# Altium PCB 4P_JST-PH-3_EXT.PcbDoc
Units mm, origin at the board's own origin, x right, y up, seen from the top; angles counter-clockwise.
Board outline 15 x 46.5 mm, 2 copper layers (Top Layer, Bottom Layer), stack 1.569 mm thick; 6 components, 0 nets, 26 pads, 0 vias.
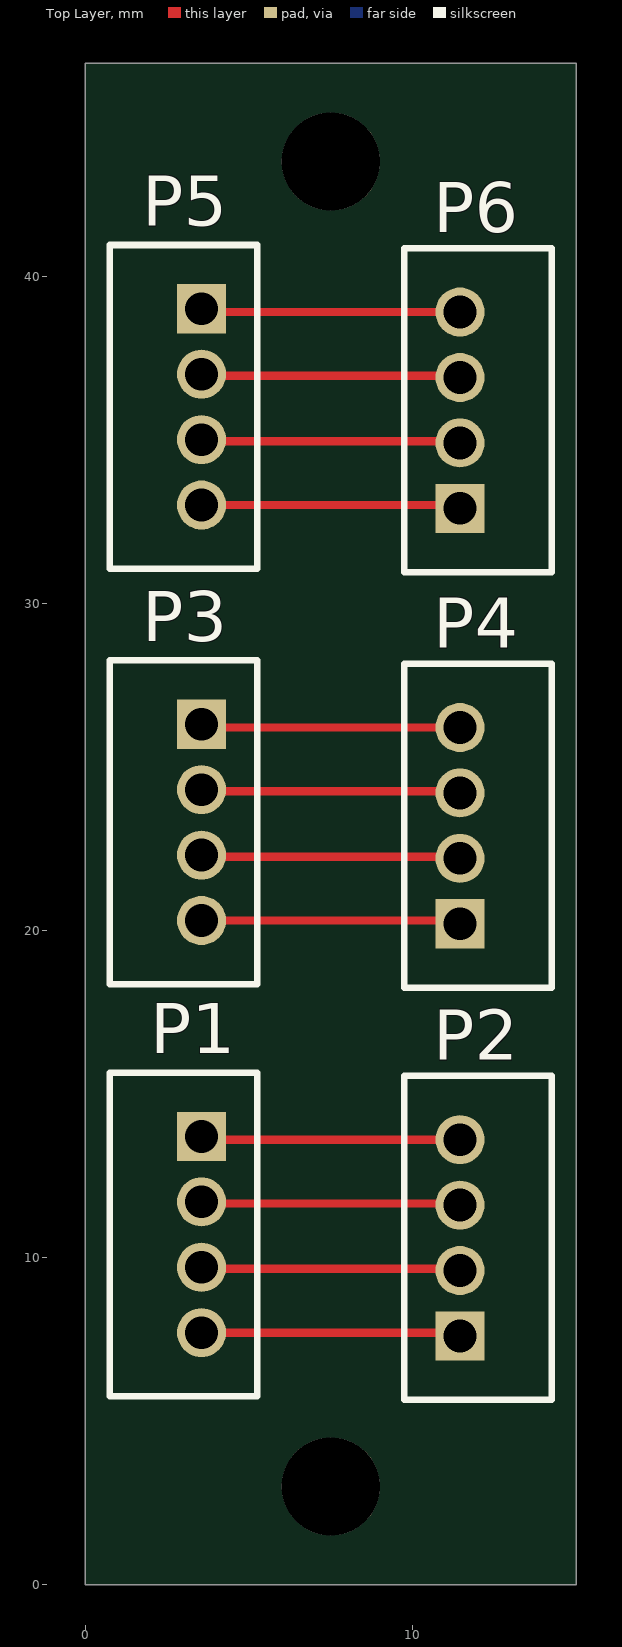
[diagram p0: Top Layer view]
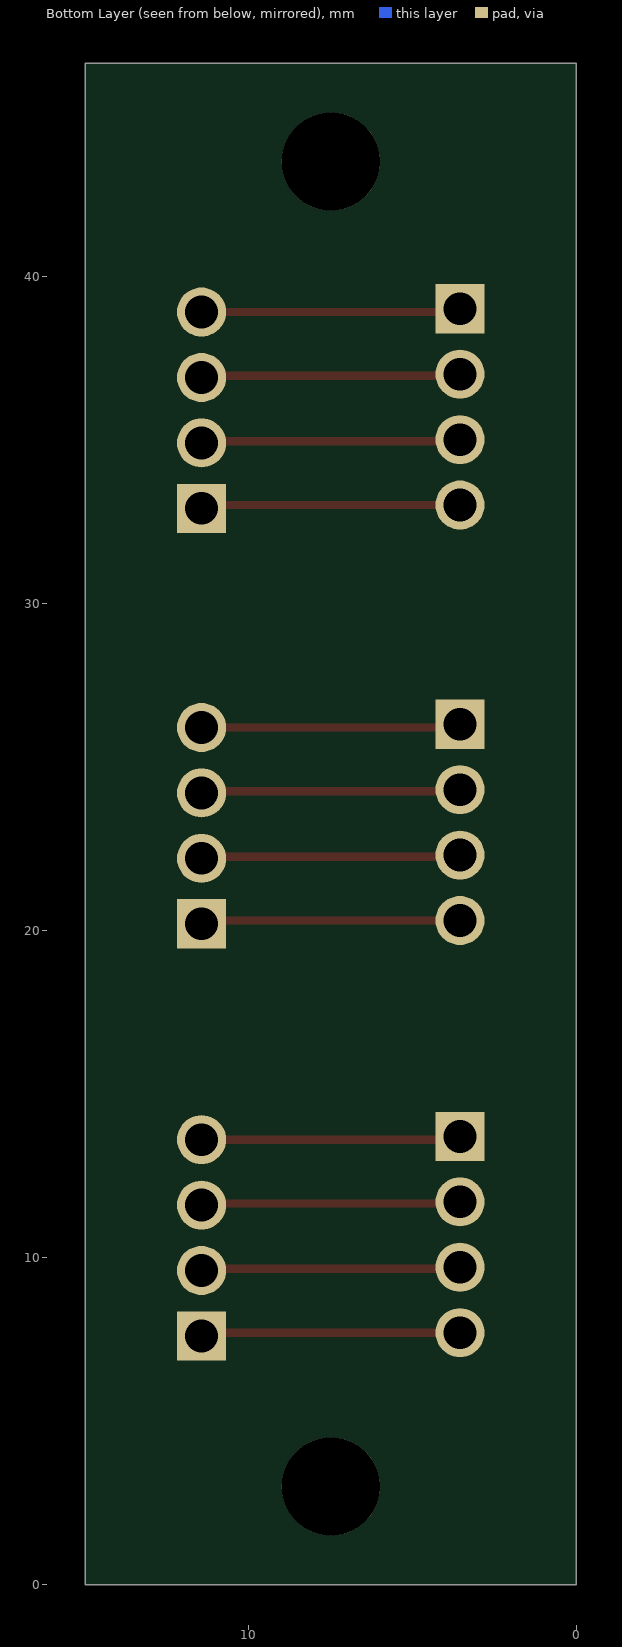
[diagram p1: Bottom Layer view, seen from below]

## Layer stack, top to bottom
Top Solder: solder mask 0.0254, SM-001, Dk 4
Top Layer: signal copper 0.035
Dielectric 1: core 1.4986, Core-043, Dk 4.3
Bottom Layer: signal copper 0.035
Bottom Solder: solder mask 0.0254, SM-001, Dk 4

## Board outline
0,0 15,0 15,46.5 0,46.5

## Design rules (kind name [scope] priority, off if disabled: settings)
Clearance [All] p1: gap=0.254 ignorepadtopadclearanceinfootprint=FALSE except(0: Arc-Hole Track-Hole SMDPad-Hole THPad-Hole Via-Hole Fill-Hole Poly-Hole Region-Hole Text-Hole)
PolygonConnect [All] p1: connectstyle=Relief reliefconductorwidth=0.254 reliefentries=4 polygonreliefangle="90 Angle" airgapwidth=0.254
RoutingVias [All] p1: holewidth=0.711 width=1.27 viastyle="Through Hole" minholewidth=0.711 minwidth=1.27 maxholewidth=0.711 maxwidth=1.27
SolderMaskExpansion [All] p1: expansion=0.102 istentingtop=FALSE
Width [All] p1: maxlimit=0.254 minlimit=0.254 preferedwidth=0.254
30 further rules are at their usual default settings.

## Components (designator, comment, footprint, x,y, rotation, side; value= is the part's Value field where it differs from the comment)
P1 "B4B-PH-K-S(LF)(SN)" JST-B4B-PH-K-S_V 3,10.7 r270 top
P2 "B4B-PH-K-S(LF)(SN)" JST-B4B-PH-K-S_V 12,10.6 r90 top
P3 "B4B-PH-K-S(LF)(SN)" JST-B4B-PH-K-S_V 3,23.3 r270 top (schematic designator P1)
P4 "B4B-PH-K-S(LF)(SN)" JST-B4B-PH-K-S_V 12,23.2 r90 top (schematic designator P2)
P5 "B4B-PH-K-S(LF)(SN)" JST-B4B-PH-K-S_V 3,36 r270 top (schematic designator P1)
P6 "B4B-PH-K-S(LF)(SN)" JST-B4B-PH-K-S_V 12,35.9 r90 top (schematic designator P2)

## Footprints (in the part's own frame and the unit in brackets; to place one, negate y for a bottom-side part, rotate by r counter-clockwise, add the part's x,y. Pads: shape width x height; smd on the part's side, far side on the other; paste and mask are expansions set on the pad)
JST-B4B-PH-K-S_V [mm] "Connector, 4-Leads, Body 9.9x4.5mm, Pitch 2mm"
  rect 1.5x1.5 hole 1: 1(-3,0.55)
  round 1.5 hole 1: 2(-1,0.55) 3(1,0.55) 4(3,0.55)
  silkscreen extent -4.95,-2.25 4.95,2.25, body extent -4.95,-2.25 4.95,2.25, height 6

## Part data
P1 P2 P3 P4 P5 P6: library part CMP-2000-05165-1, "Male Header, Pitch 2 mm, 1 x 4 Position, Height 6 mm, Tail Length 3.4 mm, -25 to 85 degC, RoHS, Bulk", Manufacturer=JST, Datasheet URL=http://datasheet.octopart.com/B4B-PH-K-S%28LF%29%28SN%29-JST-datasheet-10558886.pdf, Datasheet Version=Apr-09, Manufacturer URL=http://www.jst.com/home2.html, No of Positions=4, Pitch=2mm, Style/Orientation=StraightHeader/Plug, Termination=Crimp, Type=ShroudedHeader

## Free pads (board coordinates)
  round 3 hole 3 unplated: ""(7.5,3) ""(7.5,43.5)

## Nets (pads, with @x,y where several pads share a name; then routed paths per layer and width w, separated by ;. In a path a pad name is that pad's centre, name@x,y a point inside that pad or via, vN(x,y) a via of type N, cw(c..) or ccw(c..) an arc to the next point about the centre after c; other vN are vias at no path point)
pads on no net: P1.1 P1.2 P1.3 P1.4 P2.1 P2.2 P2.3 P2.4 P3.1 P3.2 P3.3 P3.4 P4.1 P4.2 P4.3 P4.4 P5.1 P5.2 P5.3 P5.4 P6.1 P6.2 P6.3 P6.4
copper on no net: | length 95.3
  Top Layer w0.254: 3.55,7.7 11.35,7.7 11.45,7.6 ; 3.55,9.7 3.6,9.65 11.4,9.65 11.45,9.6 ; 3.55,11.7 3.6,11.65 11.4,11.65 11.45,11.6 ; 3.55,13.7 3.65,13.6 11.45,13.6 ; 3.55,20.3 11.35,20.3 11.45,20.2 ; 3.55,22.3 3.6,22.25 11.4,22.25 11.45,22.2 ; 3.55,24.3 3.6,24.25 11.4,24.25 11.45,24.2 ; 3.55,26.3 3.65,26.2 11.45,26.2 ; 3.55,33 11.35,33 11.45,32.9 ; 3.55,35 3.6,34.95 11.4,34.95 11.45,34.9 ; 3.55,37 3.6,36.95 11.4,36.95 11.45,36.9 ; 3.55,39 3.65,38.9 11.45,38.9